# EAGLE board PickupDaughterBoard (EAGLE 7.4.0)
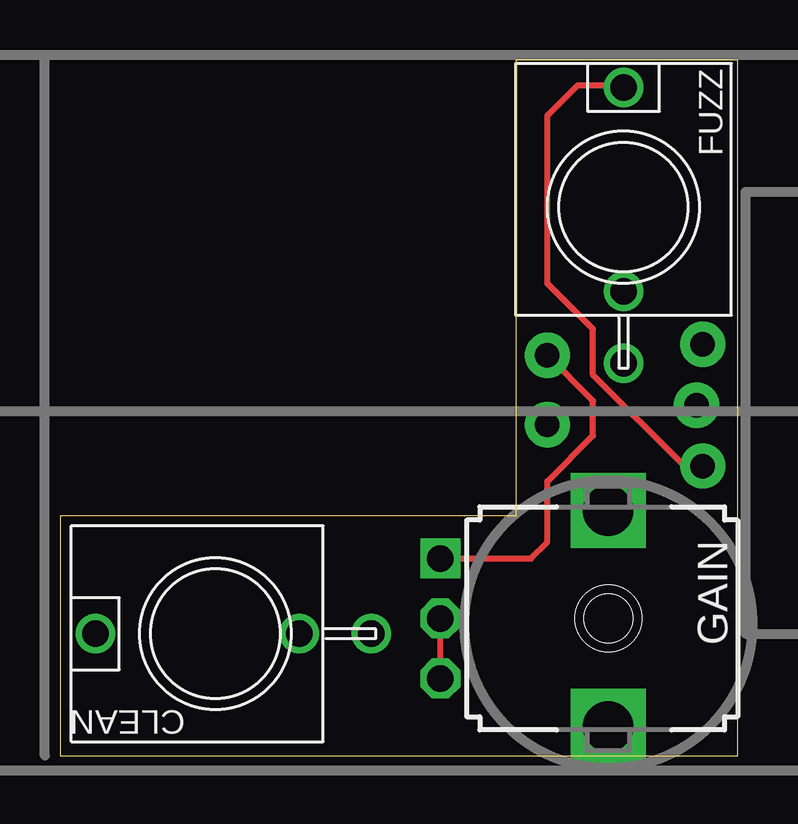
[diagram p0: board, top side]
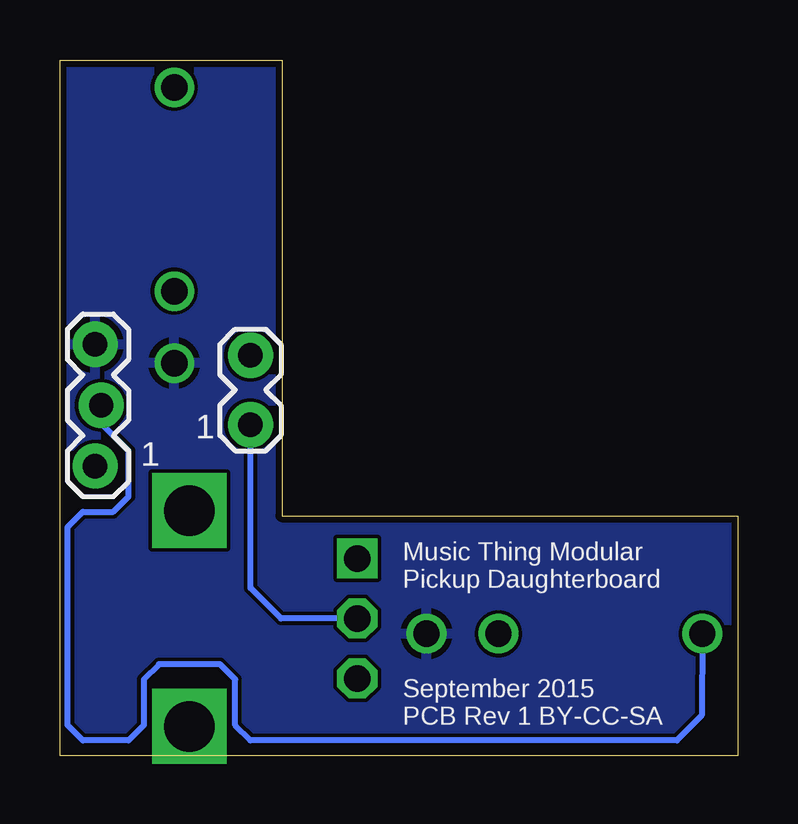
[diagram p1: board, bottom side, seen from below]

Size 28.26 x 29 mm. Coordinates in mm from the lower left corner, seen from the top.
Outline: 0,10 0,0 28.26,0 28.26,29 19,29 19,10 0,10
Copper layers (1*2*15*16): Top 0.035mm / dielectric 0.2mm / Route2 0.0175mm / dielectric 1.1mm / Route15 0.0175mm / dielectric 0.2mm / Bottom 0.035mm
Design rules "SeeedStudio_DRU_no_angle_20130527": minimum track width 6mil, minimum drill 12mil, track to track 6mil, track to pad 6mil, pad to pad 6mil, via to via 6mil, smd to smd 0mil, copper to edge 10mil, drill to drill 10mil, minimum pad ring 6mil, minimum via ring 6mil, stop-mask expansion 2mil, vias tented up to drill 25mil, thermal gap 10mil
Net classes: 0 default: width 0.254 mm; 1 power: width 0.406 mm; 2 ground: width 0.406 mm

## Footprints (pad centres in the part's own frame; a part is rotated, then mirrored left to right if it is on the bottom)
WQP-PJ301M-12_JACK = drill 1.1: P$1_TIP 0,5; P$2_SWITCH 0,-3.5; P$3_SLEEVE 0,-6.5
EVUF = drill 1.1 pad 1.676 square: 1 -2.5,-7 | drill 1.1 pad 1.676 octagon: 2 0,-7; 3 2.5,-7 | drill 2.1 pad 2.8 square: M1 4.5,0; M2 -4.5,0
1X02_LOCK = drill 1.016 pad 1.88: 1 -0.178,0; 2 2.718,0
1X03_LOCK = drill 1.016 pad 1.88: 1 0,0.127; 2 2.54,-0.127; 3 5.08,0.127

## Placement (x,y rotation side)
CLEAN  THONKICONNNEW  [WQP-PJ301M-12_JACK]  6.48,5.08 90 top
FUZZ  THONKICONNNEW  [WQP-PJ301M-12_JACK]  23.5,22.86 0 top
GAIN  50k  [EVUF]  22.86,5.71 270 top
JP2  M02LOCK  [1X02_LOCK]  20.32,13.97 90 bottom
JP3  [1X03_LOCK]  26.67,12.06 90 bottom

## Library data of the parts
CLEAN FUZZ = MusicThingModular
GAIN = TomW
JP2 JP3 = SparkFun-Connectors

## Nets
GND: CLEAN.P$3_SLEEVE FUZZ.P$3_SLEEVE JP3.3
N$1: FUZZ.P$1_TIP JP3.1
N$2: CLEAN.P$1_TIP JP3.2
N$4: GAIN.1 JP2.2
N$8: GAIN.2 GAIN.3 JP2.1

## Tracks (layer width: path | path; a pad name or v marks a point on that pad's centre or on a via)
GND
  pour Bottom: -1.91,30.8 -1.27,-1.27 29.32,-3.17 29.32,31.43
N$1
  Top 0.254: JP3.1 26.04,12.06 22.23,15.88 22.23,17.78 20.32,19.68 20.32,26.67 21.59,27.94 23.41,27.94 FUZZ.P$1_TIP
N$2
  Bottom 0.254: CLEAN.P$1_TIP 1.5,1.68 2.54,0.64 20.32,0.64 20.95,1.27 20.95,3.17 21.59,3.81 24.13,3.81 24.77,3.17 24.77,1.27 25.4,0.64 27.3,0.64 27.94,1.27 27.94,9.53 27.3,10.16 26.04,10.16 25.4,10.79 25.4,12.7 26.67,13.97 26.67,14.48 JP3.2
N$4
  Top 0.254: GAIN.1 19.64,8.21 20.32,8.89 20.32,11.43 22.23,13.34 22.23,14.78 JP2.2
N$8
  Top 0.254: GAIN.3 GAIN.2
  Bottom 0.254: GAIN.2 19.05,5.71 20.32,6.99 JP2.1

## Text on the board
bPlace: 1 | 1 | Music Thing Modular / Pickup Daughterboard / / / / September 2015 / PCB Rev 1 BY-CC-SA